# Altium PCB My_PCB.PcbDoc (part 2 of 2)
Units mil, origin at the board's own origin, x right, y up, seen from the top; angles counter-clockwise.
Board outline 5800 x 4400 mil, 2 copper layers (Top Layer, Bottom Layer); 133 components, 156 nets, 707 pads, 234 vias.
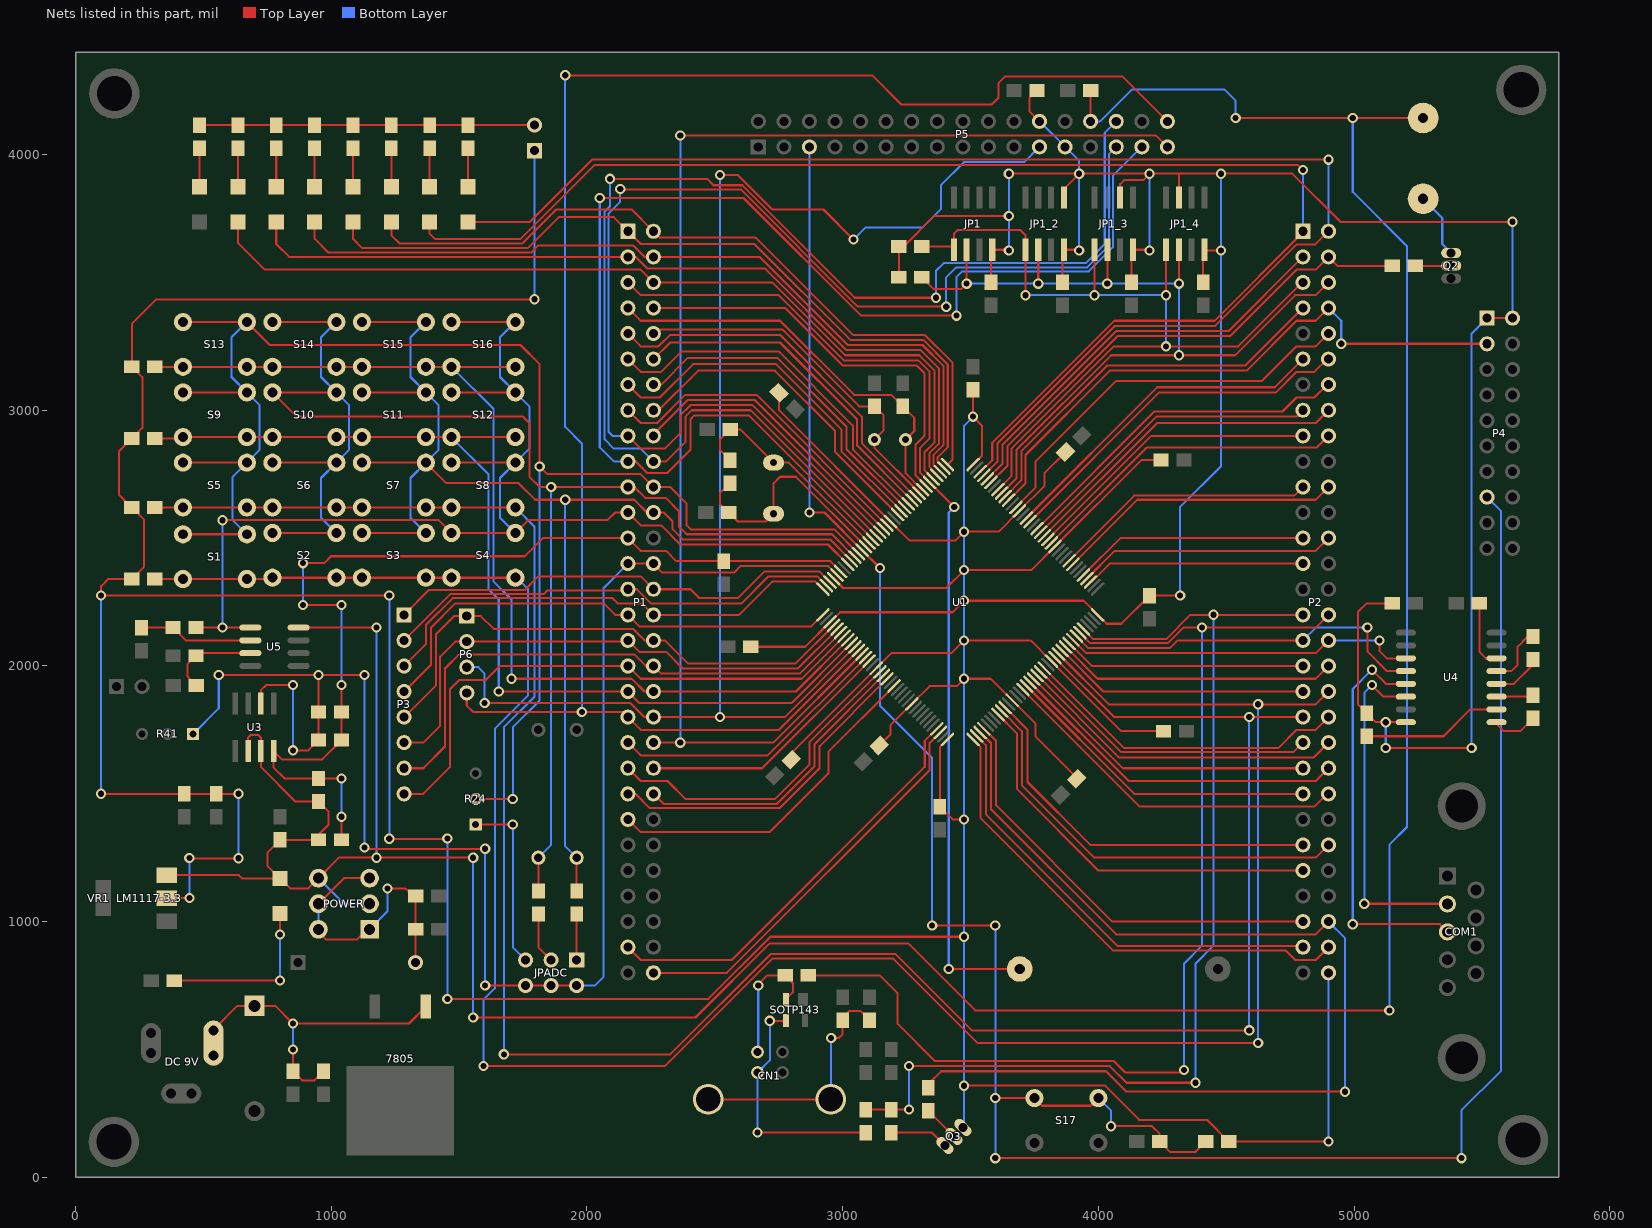
[diagram p2: the nets of this part, all layers, seen from the top]

## Via types
v1: diameter 40, hole 24, Top Layer to Bottom Layer, 233 vias
v2: diameter 40, hole 24, Top Layer to Bottom Layer, tented bottom, 1 vias

## Nets (pads, with @x,y where several pads share a name; then routed paths per layer and width w, separated by ;. In a path a pad name is that pad's centre, name@x,y a point inside that pad or via, vN(x,y) a via of type N, cw(c..) or ccw(c..) an arc to the next point about the centre after c; other vN are vias at no path point) (continued)
JTRST: P2.8 P4.3 U1.134 | length 2358
  Top Layer w8: U1.134@3649.3,2648.1 3715,2713.79 3715,2825 4045,3155 4580,3155 4775,3350 4850,3350 P2.8@4900,3400 ; v1(4950,3260) P4.3@5520,3260
  Bottom Layer w8: P2.8@4900,3400 4950,3350 v1(4950,3260)
"LCD BL": P1.40 P5.23 P6.3 U1.46 | length 5461.3
  Top Layer w8: v1(1600,1855) 2170,1855 2225,1800 P1.40@2260,1800 2773.37,1800 U1.46@3047.99,2074.62 ; P1.40@2247.73,1790 P1.40@2250,1790 ; v1(2520,3920) 2590,3920 2725,3785 2925,3785 v1(3042.5,3667.5)
  Bottom Layer w8: P6.3@1530,1995 1575,1995 1600,1970 v1(1600,1855) ; v1(2520,1800) v1(2520,3920) ; v1(3042.5,3667.5) 3089,3714 3311.51,3714 3384,3786.49 3384,3879.37 3474.63,3970 3710,3970 P5.23@3770,4030
Net7805_1: 7805.1 "DC 9V.1" "DC 9V.1A" "DC 9V.1B" C21.2 C22.1 D10.2 | length 1314.2
  Top Layer w8: 539.37,525 539.37,574.21 539.37,577.18 633.09,670.91 D10.2@700,670.91 780.9,670.91 v1(850,601.81) 1304.09,601.81 7805.1@1370,667.72 ; v1(850,500) C21.2@850,415 886,379 934,379 C22.1@970,415
  Bottom Layer w8: v1(850,500) v1(850,601.81)
NetC4_2: C4.2 R19.1 U1.24 Y2.1 | length 951.1
  Top Layer w8: R19.1@2560,2715 2520,2675 2520,2635 C4.2@2555,2600 2590,2565 2700,2565 Y2.1@2730,2595 2730,2715 2755,2740 2816.89,2740 U1.24@3089.74,2467.14
NetC5_2: C5.2 R19.2 U1.23 Y2.2 | length 880.7
  Top Layer w8: R19.2@2560,2805 2520,2845 2520,2885 C5.2@2560,2925 2600,2925 Y2.2@2730,2795 2789.72,2795 U1.23@3103.66,2481.06
NetC23_2: C23.2 C24.1 F1.2 POWER.1 POWER.3 POWER.5 POWER.6 | length 1141.8
  Top Layer w8: POWER.6@950,960 980,930 1100,930 1140,970 POWER.1@1150,970 ; POWER.5@950,1070 1050,1170 POWER.3@1150,1170 ; v1(1220,1130) 1290,1130 1320,1100 C24.1@1330,1100 C23.2@1330,970 ; F1.2@1329.33,840 C23.2@1329.33,970
  Bottom Layer w8: POWER.6@950,970 POWER.5@950,1070 ; POWER.1@1150,970 1220,1040 v1(1220,1130)
NetC30_1: C30.1 U4.1 | length 180.1
  Top Layer w8: U4.1@5553.58,1776.42 5585,1745 5650,1745 C30.1@5700,1795
NetC30_2: C30.2 U4.3 | length 137.8
  Top Layer w8: U4.3@5557.17,1880 C30.2@5695,1880
NetC31_1: C31.1 U4.4 | length 173.9
  Top Layer w8: U4.4@5557.17,1930 5625,1930 C31.1@5700,2005
NetC31_2: C31.2 U4.5 | length 239.8
  Top Layer w8: U4.5@5557.17,1980 5615,1980 5640,2005 5640,2075 5680,2115 C31.2@5700,2115
NetC32_2: C32.2 U4.6 | length 267.5
  Top Layer w8: C32.2@5490,2245 5490,2055 5515,2030 U4.6@5557.17,2030
NetC33_1: C33.1 U4.2 | length 554.8
  Top Layer w8: C33.1@5050,1715 5060,1725 5350,1725 5455,1830 U4.2@5557.17,1830
NetC35_2: C35.2 CN1.5 CN1.6 R32.2 | length 956.1
  Top Layer w8: CN1.5@2474,305 CN1.6@2954,305 ; v1(2955,545) 2985,545 3000,560 C35.2@3000,615 ; C35.2@3000,625 3025,650 3070,650 R32.2@3105,615
  Bottom Layer w8: CN1.6@2954,305 v1@2954,545
NetCN1_2: CN1.2 R33.1 SOTP143.2 | length 497.5
  Top Layer w8: v1@2667.5,752.5 2705,790 R33.1@2775,790 2805,760 2805,723.74 SOTP143.2@2777.6,696.34
  Bottom Layer w8: CN1.2@2670,493 v1(2670,750)
NetCN1_3: CN1.3 R34.1 SOTP143.3 | length 943.2
  Top Layer w8: v1(2667,175) R34.1@3090,175 ; v1(2715,612) 2775.94,612 SOTP143.3@2777.6,613.66
  Bottom Layer w8: v1(2667,175) CN1.3@2667,410 2715,458 v1(2715,612)
NetD1_1: D1.1 R4.2 | length 151.1
  Top Layer w8: D1.1@1535,3873.9 R4.2@1535,4025
NetD2_1: D2.1 R5.2 | length 151.1
  Top Layer w8: D2.1@1385,3873.9 R5.2@1385,4025
NetD3_1: D3.1 R6.2 | length 151.1
  Top Layer w8: D3.1@1235,3873.9 R6.2@1235,4025
NetD4_1: D4.1 R7.2 | length 151.1
  Top Layer w8: D4.1@1085,3873.9 R7.2@1085,4025
NetD5_1: D5.1 R8.2 | length 151.1
  Top Layer w8: D5.1@935,3873.9 R8.2@935,4025
NetD6_1: D6.1 R9.2 | length 151.1
  Top Layer w8: D6.1@785,3873.9 R9.2@785,4025
NetD7_1: D7.1 R10.2 | length 151.1
  Top Layer w8: D7.1@635,3873.9 R10.2@635,4025
NetD8_1: D8.1 R11.2 | length 151.1
  Top Layer w8: D8.1@485,3873.9 R11.2@485,4025
NetD9_2: D9.2 R13.2 | length 675.1
  Top Layer w8: R13.2@386,770 v1(800,770) ; v1(800,950) D9.2@800,1031.1
  Bottom Layer w8: v1(800,770) v1(800,950)
NetJPADC_1: JPADC.1 R20.2 | length 180
  Top Layer w8: JPADC.1@1960,850 R20.2@1960,1030
NetJPADC_3: JPADC.3 R22.2 | length 200.7
  Top Layer w8: R22.2@1810,1030 1810,900 JPADC.3@1860,850
NetJPADC_5: JPADC.5 R24.1 | length 695.7
  Top Layer w8: R24.1@1565,1380 v1(1710,1380)
  Bottom Layer w8: v1(1710,1380) 1710,900 JPADC.5@1760,850
NetJPLED_2: JPLED.2 R4.1 R5.1 R6.1 R7.1 R8.1 R9.1 R10.1 R11.1 | length 1310
  Top Layer w8: R11.1@485,4115 R10.1@635,4115 R9.1@785,4115 R8.1@935,4115 R7.1@1085,4115 R6.1@1235,4115 R5.1@1385,4115 R4.1@1535,4115 JPLED.2@1795,4115
NetLS1_2: LS1.2 Q2.1 | length 257.6
  Bottom Layer w8: LS1.2@5270,3827 5345,3752 5345,3650 Q2.1@5380,3615
NetQ2_2: Q2.2 R12.2 | length 140
  Top Layer w8: R12.2@5240,3565 Q2.2@5380,3565
NetQ3_2: Q3.2 R36.1 | length 141.4
  Top Layer w8: R36.1@3335,260 Q3.2@3435,160
NetQ3_3: Q3.3 R35.1 | length 230.5
  Top Layer w8: R35.1@3190,175 3349.29,175 Q3.3@3399.64,124.64
NetR37_1: R37.1 R38.2 U5.2 | length 445.2
  Top Layer w8: R38.2@259,2150 R37.1@381,2150 431,2100 U5.2@683.51,2100
NetR39_2: R39.2 R40.2 U5.3 | length 361.2
  Top Layer w8: R40.2@472,1924 437,1959 437,2006 R39.2@471,2040 481,2050 U5.3@683.51,2050
PA0: P1.30 P3.1 U1.34 | length 1823.8
  Top Layer w8: P3.1@1285,2200 1382,2297 1757,2297 1810,2350 2210,2350 P1.30@2260,2300 2405,2300 2440,2265 2590,2265 2695,2370 2908.5,2370 U1.34@2950.55,2327.95
PA1: P1.29 P3.2 U1.35 | length 1813.6
  Top Layer w8: P3.2@1285,2100 1466,2281 1831,2281 1845,2295 P1.29@2160,2295 ; P1.29@2160,2300 2195,2300 2250,2245 2605,2245 2710,2350 2900.66,2350 U1.35@2936.63,2314.03
PA2: P1.32 P3.3 U1.36 | length 1884.6
  Top Layer w8: P3.3@1285,2000 1370,2085 1370,2160 1475,2265 2100,2265 2120,2245 2215,2245 P1.32@2260,2200 2595,2200 2725,2330 2892.82,2330 U1.36@2922.71,2300.11
PA3: P1.31 P3.4 U1.37 | length 1921.4
  Top Layer w8: P3.4@1285,1900 1390,2005 1390,2150 1485,2245 2065,2245 2110,2200 P1.31@2160,2200 2205,2155 2877.82,2155 U1.37@2922.71,2199.89
PA4: P1.34 P3.5 P6.1 U1.40 | length 2098.2
  Top Layer w8: P3.5@1285,1800 1410,1925 1410,2125 1480,2195 P6.1@1530,2195 1585,2195 1635,2145 2180,2145 2225,2100 P1.34@2260,2100 2305,2100 2395,2010 2816.34,2010 U1.40@2964.47,2158.13
PA5: P1.33 P3.6 P6.2 U1.41 | length 2119.6
  Top Layer w8: P3.6@1285,1700 1360,1700 1426,1766 1426,2036 1485,2095 P6.2@1530,2095 P1.33@2155,2095 ; P1.33@2160,2100 2205,2055 2310,2055 2375,1990 2824.18,1990 U1.41@2978.39,2144.21
PA6: P1.36 P3.7 U1.42 | length 2167.8
  Top Layer w8: P3.7@1285,1600 1360,1600 1445,1685 1445,1990 1500,2045 2185,2045 2230,2000 P1.36@2260,2000 2290,1970 2832.01,1970 U1.42@2992.31,2130.29
PA7: P1.35 P3.8 U1.43 | length 2196.6
  Top Layer w8: P3.8@1285,1500 1360,1500 1465,1605 1465,1910 1500,1945 1605,1945 1660,2000 P1.35@2160,2000 2210,1950 2839.85,1950 U1.43@3006.23,2116.37
PA8: P2.35 U1.100 | length 950.7
  Top Layer w8: U1.100@3885.93,2088.53 3974.47,2000 P2.35@4800,2000
PA9: P2.34 U1.101 U4.11 | length 1399
  Top Layer w8: U1.101@3899.85,2102.45 3952.31,2050 4850,2050 P2.34@4900,2100 ; v1(5100,2100) 5100,2058 5128,2030 U4.11@5202.83,2030
  Bottom Layer w8: P2.34@4900,2100 v1(5100,2100)
PA10: P2.33 U1.102 U4.12 | length 1466.3
  Top Layer w8: U1.102@3913.77,2116.37 3960.15,2070 4280,2070 4310,2100 P2.33@4800,2100 ; v1(5052,2150) 5052,2057 5129,1980 U4.12@5202.83,1980
  Bottom Layer w8: P2.33@4800,2100 4850,2150 v1(5052,2150)
PA11: P2.32 R33.2 U1.103 | length 4472.1
  Top Layer w8: R33.2@2865,790 3145,790 3215,720 3215,600 3360,455 4060,455 4105,410 v1@4335,410 ; U1.103@3927.69,2130.29 3968.99,2089 4271.63,2089 4332.63,2150 4850,2150 P2.32@4900,2200
  Bottom Layer w8: 4335,440 4335,835 4405,905 v1(4405,2150)
  other v1: 4335,420
PA12: P2.31 R34.2 R35.2 U1.104 | length 4259.9
  Top Layer w8: R34.2@3090,265 R35.2@3190,265 v1(3260,265) ; v1(3260,435) 4045,435 4110,370 v1(4380,370) ; U1.104@3941.61,2144.21 3980.82,2105 4265,2105 4360,2200 P2.31@4800,2200
  Bottom Layer w8: v1(3260,265) v1(3260,435) ; v1(4380,370) 4380,835 4450,905 v1(4450,2200)
PB1: P1.39 P5.34 P6.4 U1.47 | length 6821.8
  Top Layer w8: P6.4@1530,1895 1530,1845 1555,1820 v1(1980,1820) 2140,1820 P1.39@2160,1800 2210,1750 2751.21,1750 U1.47@3061.9,2060.7 ; v1(1915,4310) 3115,4310 3230,4195 3582,4195 3610,4223 3610,4280 3636,4306 4094,4306 P5.34@4270,4130
  Bottom Layer w8: v1(1915,4310) 1915,2935 1980,2870 v1(1980,1820)
PB2: P1.42 P5.33 U1.48 | length 5258.1
  Top Layer w8: P1.42@2260,1700 2729.05,1700 U1.48@3075.82,2046.78 ; v1(2365,4075) 4225,4075 P5.33@4270,4030
  Bottom Layer w8: v1(2365,1700) v1(2365,4075)
PB5: P2.7 U1.135 | length 1536.7
  Top Layer w8: U1.135@3635.38,2662.02 3699,2725.63 3699,2839 4035,3175 4575,3175 P2.7@4800,3400
PB6: JP1.6 JP1_2.6 JP1_3.6 JP1_4.6 P2.6 R31.2 U1.136 | length 3527.1
  Top Layer w8: R31.2@3310,3520 3355,3475 3465,3475 v1(3485,3495) JP1.6@3485,3627.64 ; U1.136@3621.47,2675.93 3680,2734.47 3680,2845 4050,3215 v1(4315,3215) 4535,3215 4770,3450 4850,3450 P2.6@4900,3500 ; v1(3765,3495) JP1_2.6@3765,3627.64 ; v1(4035,3495) JP1_3.6@4035,3627.64 ; v1(4315,3495) JP1_4.6@4315,3627.64
  Bottom Layer w8: v1(3485,3495) v1(3765,3495) v1(4035,3495) v1(4315,3495) v1(4315,3215)
PB7: JP1.5 JP1_2.5 JP1_3.5 JP1_4.5 P2.5 R30.2 U1.137 | length 3408
  Top Layer w8: R30.2@3310,3640 3422.64,3640 ; JP1.5@3435,3627.64 3435,3690 3450,3705 3695,3705 3715,3685 JP1_2.5@3715,3627.64 v1(3715,3450) ; U1.137@3607.55,2689.85 3660,2742.31 3660,2850 4060,3250 v1(4265,3250) 4547.37,3250 4797.37,3500 P2.5@4800,3500 ; v1(3985,3450) JP1_3.5@3985,3627.64 ; v1(4265,3450) JP1_4.5@4265,3627.64
  Bottom Layer w8: v1(3715,3450) v1(3985,3450) v1@4260,3450 ; v1@4255,3455 v1@4260,3450 ; v1(4265,3250) v1(4265,3450) v1@4260,3450
PB8: P2.4 R12.1 U1.139 | length 1995.4
  Top Layer w8: U1.139@3579.71,2717.69 3644,2781.98 3644,2859 4075,3290 4515,3290 4775,3550 4850,3550 P2.4@4900,3600 4935,3565 R12.1@5150,3565
PB9: P2.3 U1.140 | length 1637.4
  Top Layer w8: U1.140@3565.79,2731.61 3625,2790.82 3625,2865 4070,3310 4510,3310 P2.3@4800,3600
PB10: P1.57 U1.69 | length 1663.4
  Top Layer w8: P1.57@2160,900 2210,850 2566,850 3321,1605 3321,1707.34 U1.69@3368.13,1754.47
PB11: P1.60 U1.70 | length 1573.4
  Top Layer w8: P1.60@2260,800 2547,800 3340,1593 3340,1698.5 U1.70@3382.05,1740.55
PB12: P2.58 U1.73 | length 1930.7
  Top Layer w8: U1.73@3510.11,1712.71 3540,1682.82 3540,1405 4057,888 4732,888 4770,850 4850,850 P2.58@4900,900
PB13: P2.57 U1.74 | length 1775.3
  Top Layer w8: U1.74@3524.03,1726.63 3560,1690.66 3560,1420 4076,904 P2.57@4800,904
PB14: P2.56 R36.2 U1.75 | length 4247.4
  Top Layer w8: R36.2@3325,350 R36.2@3335,350 ; R36.2@3335,365 3385,415 4030,415 4110,335 v2(4965,335) ; U1.75@3537.95,1740.55 3580,1698.5 3580,1440 4070,950 4850,950 P2.56@4900,1000
  Bottom Layer w8: P2.56@4900,1000 4965,935 v2(4965,335)
PB15: P2.55 U1.76 | length 1707.9
  Top Layer w8: U1.76@3551.87,1754.47 3600,1706.34 3600,1455 4055,1000 P2.55@4800,1000
PC0: P1.22 R24.2 S1.2 S5.2 S9.2 S13.2 U1.26 | length 6508
  Top Layer w8: S1.2@420,2515 S1.2@670,2515 ; S5.2@420,2795 S5.2@670,2795 ; S9.2@420,3070 S9.2@670,3070 ; S13.2@420,3345 S13.2@670,3345 760,3255 1740,3255 1815,3180 v1(1815,2780) 1845,2750 2210,2750 P1.22@2260,2700 2325,2700 2390,2635 2390,2550 2405.75,2534.25 2966.96,2534.25 U1.26@3061.9,2439.3 ; R24.2@1565,1480 v1(1710,1480)
  Bottom Layer w8: S1.2@670,2515 613,2572 613,2738 S5.2@670,2795 720,2845 720,3020 S9.2@670,3070 610,3130 610,3285 S13.2@670,3345 ; v1(1710,1480) 1710,1760 1815,1865 v1(1815,2780)
PC1: P1.21 R22.1 R23.2 S2.2 S6.2 S10.2 S14.2 U1.27 | length 6269.7
  Top Layer w8: S2.2@770,2520 S2.2@1020,2520 ; S6.2@770,2795 S6.2@1020,2795 ; S14.2@770,3345 S14.2@1020,3345 ; S10.2@1020,3070 S10.2@770,3070 865,2975 1750,2975 1775,2950 1775,2740 1815,2700 P1.21@2160,2700 2185,2700 2227.91,2657.09 2307.91,2657.09 2360,2605 2360,2545 2390,2515 2958.37,2515 U1.27@3047.99,2425.38 ; R22.1@1810,1120 R23.2@1810,1250
  Bottom Layer w8: S2.2@1020,2520 960,2580 960,2735 S6.2@1020,2795 1070,2845 1070,3020 S10.2@1020,3070 960,3130 960,3285 S14.2@1020,3345 ; R23.2@1810,1250 1860,1300 v1(1860,2700)
PC2: P1.24 R20.1 R21.2 S3.2 S7.2 S11.2 S15.2 U1.28 | length 5355
  Top Layer w8: S3.2@1120,2520 S3.2@1370,2520 ; S7.2@1120,2795 S7.2@1370,2795 1450,2715 1732.32,2715 1797.32,2650 v1(1915,2650) 2185,2650 2235,2600 P1.24@2260,2600 2300,2600 2335,2565 2335,2535 2375,2495 2950.53,2495 U1.28@3034.07,2411.47 ; S11.2@1120,3070 S11.2@1370,3070 ; S15.2@1120,3345 S15.2@1370,3345 ; R20.1@1960,1120 R21.2@1960,1250
  Bottom Layer w8: S3.2@1370,2520 1310,2580 1310,2735 S7.2@1370,2795 1420,2845 1420,3020 S11.2@1370,3070 1310,3130 1310,3285 S15.2@1370,3345 ; v1(1915,2650) 1915,1295 R21.2@1960,1250
PC3: P1.23 R37.2 S4.2 S8.2 S12.2 S16.2 U1.29 U5.1 | length 4935.3
  Top Layer w8: R37.2@471,2150 v1(575,2150) U5.1@683.51,2150 ; v1(575,2570) 1420,2570 S4.2@1470,2520 S4.2@1720,2520 1770,2570 2080,2570 2110,2600 P1.23@2160,2600 2210,2550 2290,2550 2365,2475 2942.69,2475 U1.29@3020.15,2397.55 ; S8.2@1470,2795 S8.2@1720,2795 ; S12.2@1470,3070 S12.2@1720,3070 ; S16.2@1470,3345 S16.2@1720,3345
  Bottom Layer w8: v1(575,2150) v1(575,2570) ; S4.2@1720,2520 1660,2580 1660,2735 S8.2@1720,2795 1775,2850 1775,3015 S12.2@1720,3070 1660,3130 1660,3285 S16.2@1720,3345
PC4: P1.38 R14.2 S13.1 S14.1 S15.1 S16.1 U1.44 | length 4152.1
  Top Layer w8: R14.2@310,3170 S13.1@420,3170 S13.1@670,3170 S14.1@770,3170 S14.1@1020,3170 S15.1@1120,3170 S15.1@1370,3170 S16.1@1470,3170 S16.1@1720,3170 ; v1(1705,1950) 2175,1950 2225,1900 P1.38@2260,1900 2817.69,1900 U1.44@3020.15,2102.45
  Bottom Layer w8: S16.1@1470,3170 1635,3005 1635,2330 1705,2260 v1@1705,1945
PC5: P1.37 R15.2 S9.1 S10.1 S11.1 S12.1 U1.45 | length 3971.1
  Top Layer w8: R15.2@310,2890 S9.1@415,2890 ; S9.1@420,2895 S9.1@670,2895 S10.1@770,2895 S10.1@1020,2895 S11.1@1120,2895 S11.1@1370,2895 S12.1@1470,2895 S12.1@1720,2895 ; v1(1655,1900) P1.37@2160,1900 2205,1855 2800.53,1855 U1.45@3034.07,2088.53
  Bottom Layer w8: S12.1@1470,2895 1615,2750 1615,2300 1655,2260 v1(1655,1900)
PC6: P2.39 R16.2 S5.1 S6.1 S7.1 S8.1 U1.96 | length 9121.8
  Top Layer w8: R16.2@310,2620 S5.1@420,2620 S5.1@670,2620 S6.1@770,2620 S6.1@1020,2620 S7.1@1120,2620 S7.1@1370,2620 S8.1@1470,2620 S8.1@1720,2620 ; v1(1675,481) 2326,481 2718,873 3207,873 3505,575 v1(4590,575) ; U1.96@3830.26,2032.86 4063.11,1800 P2.39@4800,1800
  Bottom Layer w8: v1(1675,481) 1675,1760 1795,1880 1795,2545 S8.1@1720,2620 ; v1(4590,575) v1(4590,1800)
PC7: P2.38 R17.2 S1.1 S2.1 S3.1 S4.1 U1.97 | length 9234.8
  Top Layer w8: R17.2@310,2340 S1.1@420,2340 S1.1@670,2340 S2.1@765,2340 ; S2.1@770,2345 S2.1@1020,2345 S3.1@1120,2345 S3.1@1370,2345 S4.1@1470,2345 S4.1@1720,2345 ; v1(1595,435) 2305,435 2725,855 3198,855 3528,525 v1(4625,525) ; U1.97@3844.18,2046.78 4040.95,1850 4850,1850 P2.38@4900,1900
  Bottom Layer w8: v1(1595,435) 1595,694 1640,739 1640,1755 1770,1885 1770,2300 1725,2345 S4.1@1720,2345 ; v1(4625,525) v1(4625,1850)
PC8: P2.37 U1.98 | length 1008.5
  Top Layer w8: U1.98@3858.1,2060.7 4018.79,1900 P2.37@4800,1900
PC9: P2.36 U1.99 | length 1100.3
  Top Layer w8: U1.99@3872.02,2074.62 3996.63,1950 4850,1950 P2.36@4900,2000
PC10: P2.27 U1.111 | length 860.4
  Top Layer w8: U1.111@3969.45,2327.95 3972.23,2327.95 4044.29,2400 P2.27@4800,2400
PC11: P2.26 U1.112 | length 1010
  Top Layer w8: U1.112@3955.53,2341.87 4063.66,2450 4850,2450 P2.26@4900,2500
PC12: P2.25 U1.113 | length 918.1
  Top Layer w8: U1.113@3941.61,2355.79 4085.82,2500 P2.25@4800,2500
PC13: P1.8 U1.7 | length 1638.5
  Top Layer w8: P1.8@2260,3400 2775,3400 3000,3175 3290,3175 3320,3145 3320,2900 3285,2865 3285,2745.15 U1.7@3326.37,2703.77
PC14: C2.2 P1.7 U1.8 Y1.1 | length 1618.9
  Top Layer w8: P1.7@2160,3400 2210,3350 2755,3350 3045,3060 3190,3060 C2.2@3235,3015 3280,2970 3280,2918.98 Y1.1@3246.02,2885 3246.02,2753.98 U1.8@3310.15,2689.85
PC15: C3.2 P1.10 U1.9 Y1.2 | length 1436.3
  Top Layer w8: P1.10@2260,3300 2275,3315 2765,3315 3065,3015 C3.2@3125,3015 3160,2980 3160,2921.02 Y1.2@3123.98,2885 3123.98,2853.28 3298.53,2678.72 U1.9@3298.53,2675.93
PD2: P2.22 U1.116 | length 1125.4
  Top Layer w8: U1.116@3899.85,2397.55 4152.31,2650 4850,2650 P2.22@4900,2700
PD3: P2.21 U1.117 | length 1033.6
  Top Layer w8: U1.117@3885.93,2411.47 4140.47,2666 4766,2666 P2.21@4800,2700
PD6: P2.18 U1.122 | length 1257.2
  Top Layer w8: U1.122@3816.34,2481.06 4190.28,2855 4855,2855 P2.18@4900,2900
PD7: P2.17 U1.123 | length 1165.3
  Top Layer w8: U1.123@3802.42,2494.98 4207.44,2900 P2.17@4800,2900
PD11: P2.51 U1.80 | length 1572.7
  Top Layer w8: U1.80@3607.55,1810.15 3681,1736.69 3681,1519 4000,1200 P2.51@4800,1200
PD12: P2.50 U1.81 | length 1660.9
  Top Layer w8: U1.81@3621.47,1824.07 3701,1744.53 3701,1533 3984,1250 4850,1250 P2.50@4900,1300
PD13: P2.49 U1.82 | length 1507.2
  Top Layer w8: U1.82@3635.38,1837.99 3723,1750.37 3723,1546 3969,1300 P2.49@4800,1300
PE0: D1.2 P2.2 U1.141 | length 5530.9
  Top Layer w8: D1.2@1535,3736.1 1776.1,3736.1 2020.75,3980.75 v1@4899.25,3980.75 ; U1.141@3551.87,2745.53 3605,2798.66 3605,2870 4065,3330 4457.63,3330 4776.31,3648.69 4848.69,3648.69 P2.2@4900,3700
  Bottom Layer w8: P2.2@4900,3700 v1(4900,3980)
PE1: D2.2 P2.1 U1.142 | length 5533
  Top Layer w8: D2.2@1385,3736.1 1385,3691 1407,3669 1739,3669 2030,3960 4780,3960 v1(4800,3940) ; U1.142@3537.95,2759.45 3540.73,2759.45 3585,2803.72 3585,2872.63 4062.37,3350 4455,3350 4800,3695 P2.1@4800,3700
  Bottom Layer w8: P2.1@4800,3700 v1(4800,3940)
PE2: D3.2 P1.2 U1.1 | length 2969.4
  Top Layer w8: D3.2@1235,3736.1 1235,3685 1268,3652 1747,3652 1880,3785 2175,3785 P1.2@2260,3700 2285,3675 2660,3675 3040,3295 3320,3295 3430,3185 3430,2807.4 U1.1@3409.89,2787.29
PE3: D4.2 P1.1 U1.2 | length 3129.2
  Top Layer w8: D4.2@1085,3736.1 1085,3670 1121,3634 1769,3634 1890,3755 2105,3755 P1.1@2160,3700 2210,3650 2655,3650 3030,3275 3315,3275 3411,3179 3411,2856 3371.29,2816.29 3371.29,2800.83 3397.36,2774.76 U1.2@3395.97,2773.37
PE4: D5.2 P1.4 U1.3 | length 3196.1
  Top Layer w8: D5.2@935,3736.1 935,3670 988,3617 1782,3617 1810,3645 2180,3645 2225,3600 P1.4@2260,3600 2675,3600 3020,3255 3312.27,3255 3395,3172.27 3395,2864.75 3355,2824.75 3355,2786.5 U1.3@3382.05,2759.45
PE5: D6.2 P1.3 U1.4 | length 3324.3
  Top Layer w8: D6.2@785,3736.1 785,3650 835,3600 2190,3600 2235,3555 2695,3555 3015,3235 3305,3235 3376,3164 3376,2868.37 3339,2831.37 3339,2778.46 3368.13,2749.33 U1.4@3368.13,2745.53
PE6: D7.2 P1.6 U1.5 | length 3467.3
  Top Layer w8: D7.2@635,3736.1 635,3655 740,3550 2210,3550 P1.6@2260,3500 2725,3500 3010,3215 3300,3215 3360,3155 3360,2875 3320,2835 3320,2765.82 U1.5@3354.21,2731.61
PF0: P1.9 U1.10 | length 1486.7
  Top Layer w8: P1.9@2160,3300 2210,3250 2280,3250 2325,3295 2755,3295 3075,2975 3075,2871.63 U1.10@3284.62,2662.02
PF1: P1.12 U1.11 | length 1352.4
  Top Layer w8: P1.12@2260,3200 2325,3265 2755,3265 3056,2964 3056,2862.79 U1.11@3270.7,2648.1
PF2: P1.11 U1.12 | length 1451.2
  Top Layer w8: P1.11@2160,3200 2210,3150 2290,3150 2370,3230 2750,3230 3040,2940 3040,2848.17 3253.99,2634.18 U1.12@3256.78,2634.18
PF3: P1.14 U1.13 | length 1319.5
  Top Layer w8: P1.14@2260,3100 2290,3100 2395,3205 2745,3205 3015,2935 3015,2848.11 U1.13@3242.86,2620.26
PF4: P1.13 U1.14 | length 1430.7
  Top Layer w8: P1.13@2160,3100 2210,3050 2285,3050 2415,3180 2740,3180 2995,2925 2995,2840.28 U1.14@3228.94,2606.34
PF5: P1.16 U1.15 | length 1300.6
  Top Layer w8: P1.16@2260,3000 2280,3000 2435,3155 2735,3155 2970,2920 2970,2837.44 U1.15@3215.02,2592.42
PF6: P1.15 U1.18 | length 1290.5
  Top Layer w8: P1.15@2160,3000 2210,2950 2275,2950 2385,3060 2663.92,3060 U1.18@3173.26,2550.66
PF7: P1.18 U1.19 | length 1168.7
  Top Layer w8: P1.18@2260,2900 2260,2905 2395,3040 2656.08,3040 U1.19@3159.34,2536.74
PF8: P1.17 P5.29 U1.20 | length 5036.7
  Top Layer w8: v1(2130,3865) 2131,3864 2600.75,3864 3059.75,3405 v1(3405,3405) ; P1.17@2160,2900 2210,2850 2305,2850 2365,2910 2365,2980 2405,3020 2648.24,3020 U1.20@3145.42,2522.82
  Bottom Layer w8: v1@2130,3855 2130,3815 2085,3770 2085,2915 2100,2900 P1.17@2160,2900 ; v1@2135,3860 v1@2140,3865 ; v1(3405,3405) 3405,3520 3444,3559 3956.63,3559 4041,3643.37 4041,4001 P5.29@4070,4030
PF9: P1.20 P5.30 U1.21 | length 5245.4
  Top Layer w8: v1(2090,3905) 2470,3905 2495,3880 2607.37,3880 3047.37,3440 v1(3365,3440) ; P1.20@2260,2800 2310,2800 2385,2875 2385,2975 2410,3000 2640.4,3000 U1.21@3131.5,2508.9
  Bottom Layer w8: v1(2090,3905) 2090,3797.63 2069,3776.63 2069,2886 2105,2850 2210,2850 P1.20@2260,2800 ; v1(3365,3440) 3365,3545 3395,3575 3950,3575 4025,3650 4025,4085 P5.30@4070,4130
PF10: P1.19 P5.31 U1.22 | length 5284.4
  Top Layer w8: v1(2050,3830) 2612.12,3830 3072.12,3370 v1(3445,3370) ; P1.19@2160,2800 2190,2800 2235,2755 2315,2755 2405,2845 2405,2965 2420,2980 2632.56,2980 U1.22@3117.58,2494.98
  Bottom Layer w8: v1(2050,3830) 2050,2855 2105,2800 P1.19@2160,2800 ; v1(3445,3370) 3445,3520 3468,3543 3963.25,3543 4057,3636.75 4057,3917 P5.31@4170,4030
PF11: P1.41 U1.49 | length 1109
  Top Layer w8: P1.41@2160,1700 2210,1650 2706.89,1650 U1.49@3089.74,2032.86
PF12: P1.44 U1.50 | length 1017.2
  Top Layer w8: P1.44@2260,1600 2684.72,1600 U1.50@3103.66,2018.94
PF13: P1.43 U1.53 | length 1293.3
  Top Layer w8: P1.43@2160,1600 2210,1550 2315,1550 2386,1479 2735,1479 2870,1614 2870,1701.76 U1.53@3145.42,1977.18
PF14: P1.46 U1.54 | length 1175.3
  Top Layer w8: P1.46@2260,1500 2300,1460 2743,1460 2890,1607 2890,1693.92 U1.54@3159.34,1963.26
PF15: P1.45 U1.55 | length 1295.6
  Top Layer w8: P1.45@2160,1500 2190,1500 2246,1444 2753,1444 2910,1601 2910,1686.08 U1.55@3173.26,1949.34
PG1: P1.47 U1.57 | length 1348
  Top Layer w8: P1.47@2160,1400 2210,1350 2714,1350 2945.31,1581.31 2945.31,1665.72 U1.57@3201.1,1921.5
PG2: P2.46 U1.87 | length 1405.3
  Top Layer w8: U1.87@3704.98,1907.58 4162.56,1450 4845,1450 4895,1500 P2.46@4900,1500
PG3: P2.45 U1.88 | length 1255.7
  Top Layer w8: U1.88@3718.9,1921.5 4140.4,1500 P2.45@4800,1500
PG4: P2.44 U1.89 | length 1347.5
  Top Layer w8: U1.89@3732.82,1935.42 4118.24,1550 4850,1550 P2.44@4900,1600
PG5: P2.43 U1.90 | length 1198
  Top Layer w8: U1.90@3746.74,1949.34 4096.08,1600 P2.43@4800,1600
PG6: P2.42 U1.91 | length 1296.8
  Top Layer w8: U1.91@3760.66,1963.26 4082.39,1641.53 4841.53,1641.53 P2.42@4900,1700
PG7: P2.41 U1.92 | length 1170.1
  Top Layer w8: U1.92@3774.58,1977.18 4087.76,1664 4764,1664 P2.41@4800,1700
PG8: P2.40 U1.93 | length 1290.1
  Top Layer w8: U1.93@3788.5,1991.1 4099.6,1680 4705,1680 4775,1750 4850,1750 P2.40@4900,1800
PG9: P2.16 U1.124 | length 1314.9
  Top Layer w8: U1.124@3788.5,2508.9 4229.6,2950 4850,2950 P2.16@4900,3000
PG10: P2.15 U1.125 | length 1223.1
  Top Layer w8: U1.125@3774.58,2522.82 4226.76,2975 4775,2975 P2.15@4800,3000
PG11: P2.14 U1.126 | length 1372.6
  Top Layer w8: U1.126@3760.66,2536.74 4218.92,2995 4720,2995 4775,3050 4845,3050 4895,3100 P2.14@4900,3100
PG13: P2.12 U1.128 | length 1430.4
  Top Layer w8: U1.128@3732.82,2564.58 4238.24,3070 4695,3070 4775,3150 4845,3150 4895,3200 P2.12@4900,3200
PG14: P2.11 U1.129 | length 1338.5
  Top Layer w8: U1.129@3718.9,2578.5 4230.4,3090 4690,3090 P2.11@4800,3200
PG15: P2.10 U1.132 | length 1564.1
  Top Layer w8: U1.132@3677.14,2620.26 3755,2698.11 3755,2800 4070,3115 4640,3115 4775,3250 4850,3250 P2.10@4900,3300
RESET: C1.2 P4.15 P5.5 R1.1 S17.1 U1.25 | length 9934.5
  Top Layer w8: v1(2870,2600) 2929.05,2600 U1.25@3075.82,2453.22 v1(3146.05,2383) ; v1(3350,985) v1(3597,985) ; v1(3597,75) v1(5420,75) ; v1(3597,310) S17.1@3750,310 3780,280 3970,280 S17.1@4000,310 ; v1(4050,200) 4210,200 4240,170 C1.2@4240,140 4280,100 4380,100 R1.1@4420,140
  Bottom Layer w8: v1(2870,2600) P5.5@2870,4030 ; v1(3146.05,2383) 3146.05,1843.95 3350,1640 v1(3350,985) ; v1(3597,75) v1(3597,310) v1(3597,985) ; S17.1@4000,310 4050,260 v1(4050,200) ; v1(5420,75) 5420,262 5575,417 5575,2605 P4.15@5520,2660
RX11: COM1.2 U4.14 | length 1344.4
  Top Layer w8: v1(5040,1070) 5364.13,1070 COM1.2@5365.08,1069.06 ; v1(5070,1925) 5115,1880 U4.14@5202.83,1880
  Bottom Layer w8: v1(5040,1070) 5040,1895 v1(5070,1925)
TX11: COM1.3 U4.13 | length 1564.2
  Top Layer w8: v1(4995,990) 5335.08,990 COM1.3@5365.08,960 ; v1(5070,1985) 5125,1930 U4.13@5202.83,1930
  Bottom Layer w8: v1(4995,990) 4995,1910 v1(5070,1985)
VBAT: BT1.1 P1.5 U1.6 | length 4017.2
  Top Layer w8: P1.5@2160,3500 2210,3450 2750,3450 3005,3195 3295,3195 3340,3150 3340,2890 3302.76,2852.76 3302.76,2755.23 v1(3436.49,2621.49) ; v1(3415,815) BT1.1@3692.5,815
  Bottom Layer w8: v1(3415,815) 3415,2600 v1(3436.49,2621.49)
VCC: "VR1  LM1117-3.3.3" C18.2 C25.2 C26.2 C27.2 D9.1 LS1.1 P5.28 POWER.2 POWER.4 U3.2 U3.3 U5.8 | length 13349.5
  Top Layer w8: 356,1182 639,1182 652.1,1168.9 D9.1@800,1168.9 ; U3.2@675,1667 675,1720 685,1730 715,1730 725,1720 U3.3@725,1667 725,1605 860,1470 C26.2@950,1470 990,1430 990,1380 950,1340 C27.2@950,1320 C25.2@800,1320 750,1270 750,1218.9 D9.1@800,1168.9 ; U5.8@872.49,2150 v1(1177,2150) ; v1(1555,625) 2424.63,625 2714.63,915 3256,915 3518,653 v1(5138,653) ; v1(1555,1250) v1(1177,1250) 1030,1250 POWER.4@950,1170 910,1130 838.9,1130 D9.1@800,1168.9 ; P5.28@3970,4130 C18.2@3970,4250 ; v1(4537,4143) LS1.1@5270,4143
  Bottom Layer w8: POWER.4@950,1170 1050,1070 POWER.2@1150,1070 ; v1(1177,1250) v1(1177,2150) ; v1(1555,625) v1(1555,1250) ; P5.28@3970,4130 4007,4130 4132,4255 4492,4255 4537,4210 v1(4537,4143) ; v1(4995,4143) 4995,3854 5207,3642 5207,1370 5138,1301 v1(5138,653)
VCC3.3: "VR1  LM1117-3.3.2" C6.2 C7.2 C8.2 C9.2 C10.2 C11.2 C12.2 C12_1.1 C12_2.1 C12_3.1 C12_4.1 C13.2 C14.2 C15.2 C16.2 C17.1 C19.1 C20.2 C33.2 C34.1 JP1.8 JP1_2.1 JP1_2.8 JP1_3.2 JP1_3.8 JP1_4.3 JP1_4.8 JPLED.1 P2.60 P4.1 P4.2 P5.24 P5.25 Q3.1 R1.2 R14.1 R15.1 R16.1 R17.1 R30.1 R31.1 U1.17 U1.33 U1.39 U1.52 U1.62 U1.72 U1.84 U1.95 U1.108 U1.121 U1.131 U1.144 U4.16 | length 34161.2
  Top Layer w8: v1(100,1500) C20.2@425,1500 C19.1@550,1500 v1(637.72,1500) ; 356,1092 v1(446,1092) ; v1@445,1247.72 v1(637.72,1247.72) ; v1(1227,1324) v1@1454,1324 ; v1(1227,2275) v1(100,2275) 100,2312 128,2340 R17.1@220,2340 268,2388 268,2572 R16.1@220,2620 170,2670 170,2840 R15.1@220,2890 261,2931 261,3129 R14.1@220,3170 220,3338 316,3434 v1(1795,3434) ; v1(1454,698) 2475,698 2718,941 v1(3475,941) ; C12.2@2640,2075 2853.5,2075 U1.39@2950.55,2172.05 2952.05,2172.05 2990,2210 3430,2210 v1(3475,2255) 3942.18,2255 U1.108@3997.29,2199.89 4032.18,2165 4090,2165 C14.2@4200,2275 v1(4320,2275) ; C15.2@2751.36,3068.64 2751.36,3000.4 U1.17@3187.18,2564.58 3261.76,2490 3440,2490 v1(3475,2525) 3609.72,2525 U1.131@3691.06,2606.34 3790,2705.28 3790,2755 C8.2@3871.36,2836.36 ; C6.2@2798.64,1658.24 U1.52@3131.5,1991.1 3190.4,2050 3425,2050 v1(3475,2100) 3735.28,2100 U1.95@3816.34,2018.94 4090.28,1745 C10.2@4255,1745 ; U1.33@2964.47,2341.87 3001.34,2305 3405,2305 v1(3475,2375) 3738.11,2375 U1.121@3830.26,2467.14 4168.11,2805 4235,2805 C9.2@4245,2795 ; C13.2@3143.64,1688.64 3186.9,1731.9 3186.9,1768.1 U1.62@3270.7,1851.9 3340,1921.21 3446.21,1921.21 v1(3475,1950) 3579.05,1950 U1.84@3663.22,1865.82 3755,1774.05 3755,1723.28 C11.2@3915.64,1562.64 ; R31.1@3220,3520 R30.1@3220,3640 3238.03,3640 3358.03,3760 v1(3650,3760) ; C7.2@3380,1450 3430,1400 v1(3475,1400) ; C7.2@3380,1460 3380,1682.82 U1.72@3409.89,1712.71 ; v1@3475,360 4025,360 4160,225 4425,225 R1.2@4510,140 v1(4900,140) ; C16.2@3510,3080 v1(3510,2975) 3545,2940 3545,2822.18 U1.144@3510.11,2787.29 ; C12_1.1@3580,3500 JP1.8@3580,3622.64 ; JP1.8@3585,3627.64 v1@3650,3627.64 ; v1(3650,3925) v1(3925,3925) ; C17.1@3760,4250 3730,4220 3730,4170 P5.24@3770,4130 ; C12_2.1@3860,3500 JP1_2.8@3860,3622.64 ; JP1_2.8@3865,3627.64 v1@3922.36,3627.64 ; JP1_2.1@3865,3832.36 3865,3865 v1(3925,3925) ; JP1_3.2@4085,3832.36 4085,3884 4101,3900 4175,3900 v1(4200,3925) ; C12_3.1@4130,3500 JP1_3.8@4130,3622.64 ; JP1_3.8@4135,3627.64 v1@4197.36,3627.64 ; JP1_4.3@4315,3832.36 4315,3925 ; C12_4.1@4410,3500 JP1_4.8@4410,3622.64 ; JP1_4.8@4415,3627.64 4417.64,3625 v1(4480,3625) ; v1(5124,1679) v1(5460,1679) ; C34.1@5150,2245 5049,2245 5015,2211 5015,1850 C33.2@5050,1815 5085,1780 v1(5124,1780) U4.16@5202.83,1780 ; P4.1@5520,3360 P4.2@5620,3360 ; v1(5620,3737) 4947,3737 4759,3925 v1(4480,3925) 4315,3925 ; v1(3925,3925) v1(4200,3925) ; v1(4200,3925) 4315,3925
  Bottom Layer w8: v1(100,1500) v1(100,2275) ; v1@445,1095 v1(445,1249) ; v1(637.72,1247.72) v1(637.72,1500) ; v1(1227,1324) v1(1227,2275) ; v1(1454,698) v1(1454,1325) ; v1(1795,3434) JPLED.1@1795,4015 ; Q3.1@3470.36,195.36 3475,200 v1(3475,941) v1(3475,1400) v1(3475,1950) v1(3475,2100) v1(3475,2255) v1(3475,2375) v1(3475,2525) 3475,2940 v1(3510,2975) ; v1@3650,3630 v1(3650,3760) v1(3650,3925) ; P5.24@3770,4130 P5.25@3870,4030 3925,3975 v1(3925,3925) v1(3925,3625) ; v1(4200,3625) v1(4200,3925) ; v1(4320,2275) 4320,2622 4480,2782 v1(4480,3625) v1(4480,3925) ; v1(4900,140) P2.60@4900,800 ; v1(5124,1679) v1(5124,1780) ; v1(5460,1679) 5460,3300 P4.1@5520,3360 ; P4.2@5620,3360 v1(5620,3737)
  other v1: 3475,358 3650,3625
VREF+: C28.2 C29.1 JPADC.2 JPADC.4 JPADC.6 P1.27 P1.28 R41.1 U1.32 U3.6 | length 6327.6
  Top Layer w8: v1(560,1965) v1(950,1965) ; U3.6@725,1853 725,1905 745,1925 v1(850,1925) ; v1(850,1670) 910,1670 C28.2@950,1710 C29.1@950,1820 v1(950,1965) ; v1(1130,1290) 1135,1285 v1(1602,1285) ; v1(1130,1965) v1(950,1965) ; v1(1602,750) JPADC.6@1760,750 JPADC.4@1860,750 JPADC.2@1960,750 ; P1.27@2160,2400 P1.28@2260,2400 2295,2365 2575,2365 2600,2390 2944.18,2390 U1.32@2978.39,2355.79
  Bottom Layer w8: R41.1@460,1734 560,1834 v1(560,1965) ; v1(850,1670) v1(850,1925) ; v1(1130,1290) v1(1130,1965) ; v1(1602,750) v1(1602,1285) ; JPADC.2@1960,750 2030,750 2065,785 2065,2305 P1.27@2160,2400
VREF-: C26.1 C27.1 C28.1 C29.2 P1.25 R25.2 U1.31 U3.4 | length 3935.2
  Top Layer w8: v1(890,2238) v1(1040,2238) ; v1(890,2402) 972,2402 999,2429 1756.63,2429 1827.63,2500 P1.25@2160,2500 2210,2450 2310,2450 2350,2410 2450,2410 R25.2@2535,2410 2952.02,2410 U1.31@2992.31,2369.71 ; C27.1@1040,1320 v1(1040,1410) ; v1(1040,1560) C26.1@950,1560 817.63,1560 775,1602.63 U3.4@775,1667 807,1635 965,1635 C28.1@1040,1710 C29.2@1040,1820 v1(1040,1925)
  Bottom Layer w8: v1(890,2238) v1(890,2402) ; v1(1040,1410) v1(1040,1560) ; v1(1040,1925) v1(1040,2238)
pads on no net: "VR1  LM1117-3.3.0" COM1.1 COM1.4 COM1.6 COM1.7 COM1.8 COM1.9 P4.17 P5.32 U1.106 U3.1 U3.5 U3.7 U3.8 U4.7 U4.8 U4.9 U4.10 U5.5 U5.6 U5.7

## Polygon pours and split planes (outlines as drawn)
GND on Top Layer "Bottom Layer-No Net" (hatched 90Degree grid 10 track 10, remove dead copper, pour order 6): -264.97,4415.33 -217.44,4460 6045,4460 6045,-592.13 5719.48,-898 5283.38,-488.24 -1132,-488.24
GND on Bottom Layer "Bottom Layer-No Net" (hatched Horizontal grid 10 track 10, remove dead copper, pour order 8): -204,4495.96 5932,4495.96 5957,4470.84 5957,-159.86 5927,-190 -284,-190 -320,-153.83

## Keep-outs
Keep-Out Layer:
  lines w10: -5,2 5795,2 5799,6 5799,4398 -5,4398 -5,2

## Text inside footprints (layer, text, board x,y; h text height)
BT1: Top Overlay "+" at 3595,865 h30 r180
CN1: Top Overlay "GND" at 2811,392 h30; Top Overlay "D+" at 2559,393 h30; Top Overlay "D-" at 2560,482 h30; Top Overlay "VCC" at 2821,489 h30
COM1: Top Overlay "1" at 5229.06,1187.95 h30 r270; Top Overlay "5" at 5229.06,761.57 h30 r270; Top Overlay "9" at 5599.13,816.1 h30 r270; Top Overlay "6" at 5599.13,1143.27 h30 r270
JPADC: Top Overlay "6" at 1685,770 h30 r180; Top Overlay "5" at 1687,870 h30 r180; Top Overlay "2" at 2060,770 h30 r180; Top Overlay "1" at 2056,866 h30 r180
P1: Top Overlay "2" at 2240,3800 h30 r270; Top Overlay "1" at 2140,3800 h30 r270; Top Overlay "59" at 2139,717 h30 r270; Top Overlay "60" at 2242,718 h30 r270
P2: Top Overlay "2" at 4880,3800 h30 r270; Top Overlay "1" at 4780,3800 h30 r270; Top Overlay "59" at 4780,720 h30 r270; Top Overlay "60" at 4880,720 h30 r270
P4: Top Overlay "20" at 5599,2385 h30 r270; Top Overlay "19" at 5500,2383 h30 r270; Top Overlay "1" at 5500,3460 h30 r270; Top Overlay "2" at 5600,3464 h30 r270
P5: Top Overlay "2" at 2550,4110 h30; Top Overlay "1" at 2550,4010 h30; Top Overlay "33" at 4353,4009 h30; Top Overlay "34" at 4350,4112 h30
U3: Mechanical 1 "RefDes2" at 795,1899 h30 r270; Mechanical 1 "*" at 648,1725 h30 r90; Top Overlay "*" at 659,1727 h30 r90